# EAGLE board bk-cir2 (EAGLE 9.1.0)
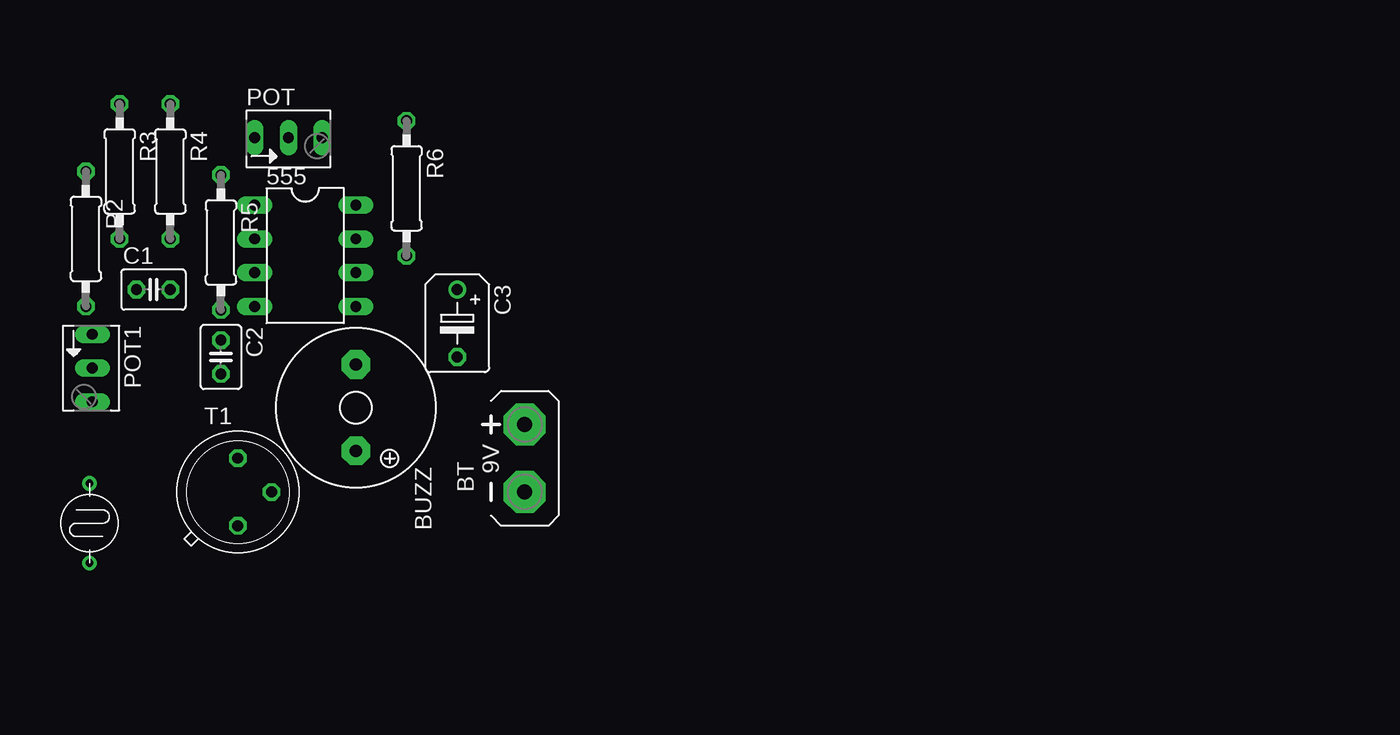
[diagram p0: board, top side]
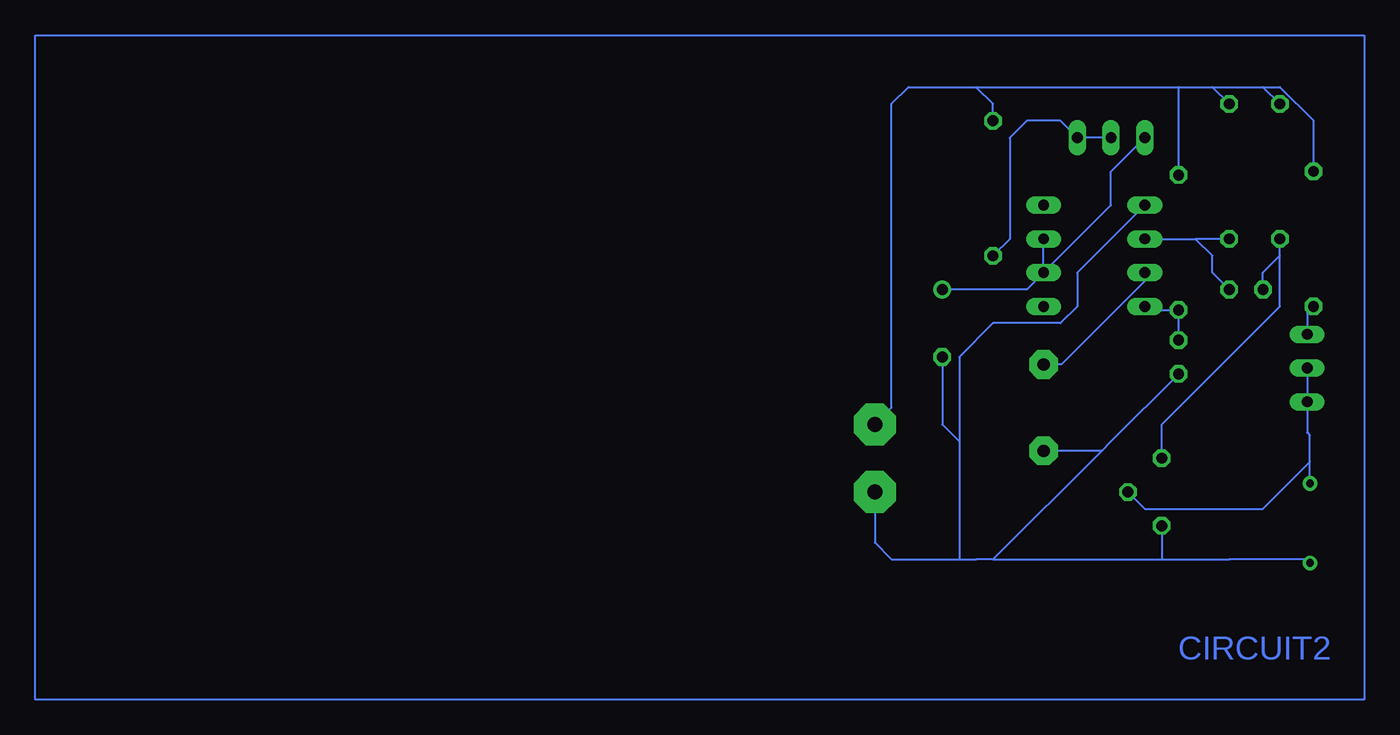
[diagram p1: board, bottom side, seen from below]

No outline drawn. Coordinates in mm, seen from the top.
Copper layers (1*16): Top 0.035mm / dielectric 1.5mm / Bottom 0.035mm
Design rules "default": minimum track width 6mil, minimum drill 0.35mm, track to track 6mil, track to pad 6mil, pad to pad 6mil, via to via 6mil, smd to smd 6mil, copper to edge 40mil, drill to drill 6mil, minimum pad ring 10mil, minimum via ring 8mil, stop-mask expansion 4mil, vias tented up to drill 0mil, thermal gap 10mil

## Footprints (pad centres in the part's own frame; a part is rotated, then mirrored left to right if it is on the bottom)
DIL08 = drill 0.813 long: 1 -3.81,-3.81; 2 -1.27,-3.81; 3 1.27,-3.81; 4 3.81,-3.81; 5 3.81,3.81; 6 1.27,3.81; 7 -1.27,3.81; 8 -3.81,3.81
AB9V = drill 1.118 pad 3.15 octagon: + 0,2.54; - 0,-2.54
F/QMBIII = drill 0.914 pad 2.159 octagon: + 3.251,0; - -3.251,0
C025-030X050 = drill 0.813 octagon: 1 -1.27,0; 2 1.27,0
B45181B = drill 0.813: + -2.54,0 | drill 0.813 octagon: - 2.54,0
LDR-PG5 = drill 0.6: 1 1,1; 2 7,1
B64Y = drill 0.813 long: A 2.54,0; E -2.54,0; S 0,0
0207/10 = drill 0.813 octagon: 1 -5.08,0; 2 5.08,0
TO5 = drill 0.813 octagon: 1 0,-2.54; 2 2.54,0; 3 0,2.54

## Placement (x,y rotation side)
555  [DIL08]  20.32,33.4 270 top
BT  [AB9V]  36.83,18.16 0 top
BUZZ  [F/QMBIII]  24.13,21.97 270 top
C1  0.1uF  [C025-030X050]  8.89,30.86 0 top
C2  0.01uF  [C025-030X050]  13.97,25.78 270 top
C3  10uF  [B45181B]  31.75,28.32 270 top
LDR  [LDR-PG5]  5.08,9.27 90 top
POT  1M  [B64Y]  19.05,42.29 0 top
POT1  100k  [B64Y]  4.29,24.95 270 top
R2  10k  [0207/10]  3.81,34.67 270 top
R3  1M  [0207/10]  6.35,39.75 270 top
R4  1M  [0207/10]  10.16,39.75 270 top
R5  1M  [0207/10]  13.97,34.4 270 top
R6  47k  [0207/10]  27.94,38.48 270 top
T1  [TO5]  15.24,15.62 0 top

## Library data of the parts
555 = ic-package
BT = battery
BUZZ = buzzer
C1-C3 R2-R6 = resistor
LDR = ldr
POT POT1 = pot
T1 = transistor

## Nets
S$1: 555.1 BT.- BUZZ.+ C2.2 C3.- LDR.1 T1.1
S$3: 555.4 C2.1 R5.2
S$4: 555.3 BUZZ.-
S$5: 555.6 555.7 C3.+ POT.E
S$6: LDR.2 POT1.A POT1.S T1.2
S$7: POT1.E R2.2
S$8: 555.2 C1.2 R4.2
S$9: C1.1 R3.2 T1.3
S$11: POT.A POT.S R6.2
S$12: BT.+ R2.1 R3.1 R4.1 R5.1 R6.1

## Tracks (layer width: path | path; a pad name or v marks a point on that pad's centre or on a via)
S$1
  Bottom 0.152: C2.2 19.05,19.43 19.76,18.72 | 19.76,18.72 BUZZ.+ | C3.- 31.75,20.7 30.48,19.43 | 555.1 21.59,32.13 21.59,29.59 22.86,28.32 27.94,28.32 30.48,25.78 30.48,19.43 | T1.1 15.24,10.54 | BT.- 36.83,11.81 35.56,10.54 30.48,10.54 | 30.48,10.54 29.21,10.54 27.94,10.54 | 27.94,10.54 15.24,10.54 | 30.48,19.43 30.48,10.54 | 19.76,18.72 27.94,10.54 | 15.24,10.54 10.16,10.54 4.35,10.54 LDR.1
S$3
  Bottom 0.152: 555.4 16.24,29.32 R5.2 C2.1
S$4
  Bottom 0.152: 555.3 16.51,31.51 22.8,25.22 BUZZ.-
S$5
  Bottom 0.152: 555.6 555.7 | 555.6 25.4,30.86 C3.+ | POT.E 19.05,39.75 19.05,37.21 555.6
S$6
  Bottom 0.152: 4.08,17.89 4.08,19.89 4.29,20.1 POT1.A POT1.S | 4.08,17.89 7.62,14.35 16.51,14.35 T1.2 | LDR.2 4.08,17.89
S$7
  Bottom 0.152: R2.2 4.29,29.11 POT1.E
S$8
  Bottom 0.152: C1.2 11.43,32.13 11.43,33.4 12.7,34.67 | 555.2 12.7,34.67 | R4.2 12.7,34.67
S$9
  Bottom 0.152: T1.3 15.24,20.7 6.35,29.59 6.35,33.4 | 6.35,33.4 7.62,32.13 C1.1 | 6.35,33.4 R3.2
S$10
  Bottom 0.152: 0,0 100,0 100,50 0,50 0,0
S$11
  Bottom 0.152: R6.2 26.67,34.67 26.67,42.29 25.4,43.56 22.86,43.56 POT.A POT.S
S$12
  Bottom 0.152: R5.1 13.97,46.1 | 13.97,46.1 11.43,46.1 | 29.21,46.1 34.29,46.1 35.56,44.83 35.56,21.97 BT.+ | 29.21,46.1 13.97,46.1 | R4.1 11.43,46.1 | R2.1 3.81,43.56 6.35,46.1 7.62,46.1 | R3.1 7.62,46.1 | 11.43,46.1 7.62,46.1 | R6.1 27.94,44.83 29.21,46.1

## Text on the board
Bottom: CIRCUIT2